# Altium PCB AWSAM_5_Breakout.PcbDoc
Units mm, origin at the board's own origin, x right, y up, seen from the top; angles counter-clockwise.
Board outline 46 x 71.01 mm, 2 copper layers (Top Layer, Bottom Layer); 50 components, 51 nets, 231 pads, 48 vias.
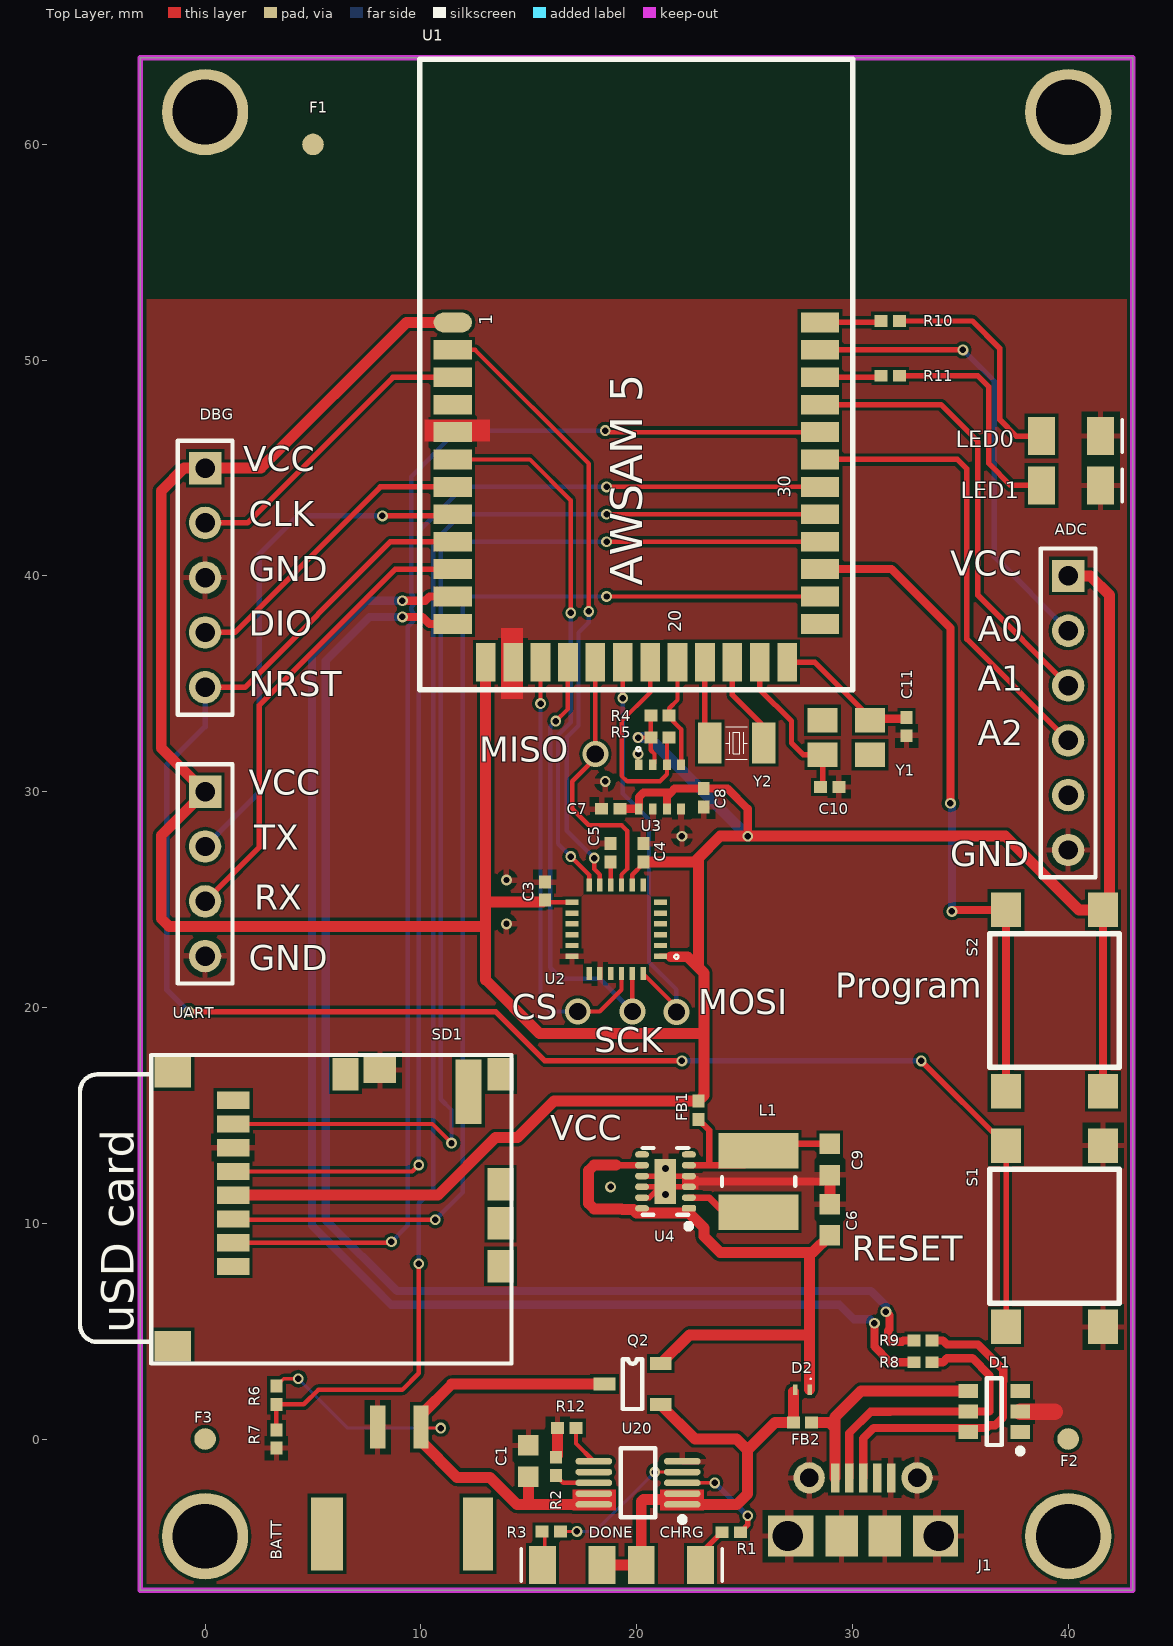
[diagram p0: Top Layer view]
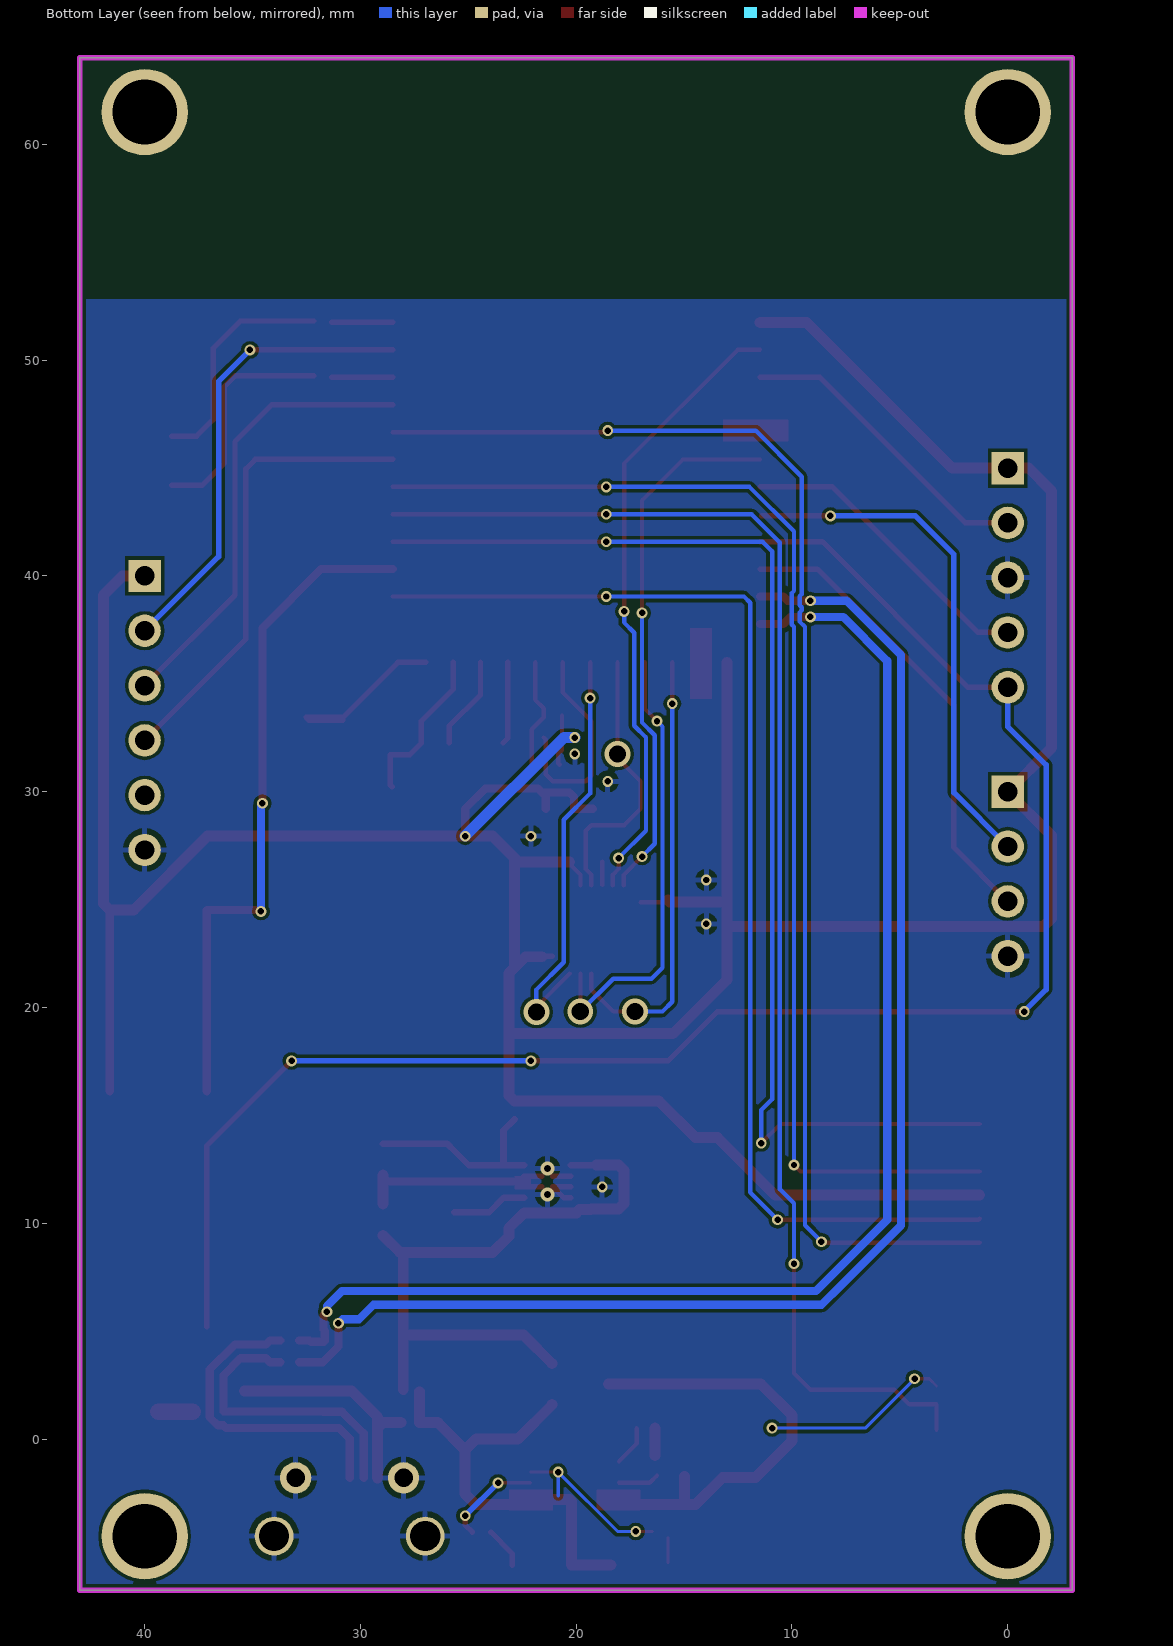
[diagram p1: Bottom Layer view, seen from below]

## Layer stack, top to bottom
Top Solder: solder mask 0.0102, Solder Resist, Dk 3.5
Top Layer: signal copper 0.0356
Dielectric 1: dielectric 0.32, FR-4, Dk 4.8
Bottom Layer: signal copper 0.0356
Bottom Solder: solder mask 0.0102, Solder Resist, Dk 3.5

## Board outline
-3,-7 -3,64.008 43,64.008 43,-7

## Design rules (kind name [scope] priority, off if disabled: settings)
Clearance [All] p1: gap=0.152
DiffPairsRouting [All] p1: maxlimit=0.254 minlimit=0.254 mostfreqgap=0.254 toplayer_minwidth=0.381 toplayer_maxwidth=0.381 toplayer_prefwidth=0.381 bottomlayer_minwidth=0.381 bottomlayer_maxwidth=0.381 bottomlayer_prefwidth=0.381 maxuncoupledlength=12.7
PolygonConnect [All] p1: connectstyle=Relief reliefconductorwidth=0.254 reliefentries=4 polygonreliefangle="90 Angle" airgapwidth=0.254
RoutingVias [All] p1: holewidth=0.3 width=0.5 viastyle="Through Hole" minholewidth=0.3 minwidth=0.5 maxholewidth=0.3 maxwidth=0.5
SilkToSolderMaskClearance [IsPad] p1: minsilkscreentomaskgap=0.152 clearancetoexposedcopper=TRUE
SolderMaskExpansion [All] p1: expansion=0.102
UnpouredPolygon [All] p1: allowunpoured=FALSE
Width [All] p1: maxlimit=0.762 minlimit=0.152 preferedwidth=0.254
27 further rules are at their usual default settings.

## Classes and differential pairs
differential pair USB_D: +USB_D_P -USB_D_N
differential pair USB: +USB_P -USB_N

## Components (designator, comment, footprint, x,y, rotation, side; value= is the part's Value field where it differs from the comment)
ADC "Header 6" HDR1X6 40,40 r270 top
BATT "JST-PH-2" JST-PH-2POS 9,-0.5 r180 top locked
C1 "CAP" CAP0603 14.986,-1.016 r270 top
C3 "CAP" CAP0402 15.748,25.4 r270 top
C4 "CAP" CAP0402 20.32,27.178 r270 top
C5 "CAP" CAP0402 18.796,27.178 r270 top
C6 "CAP" CAP0603 28.956,10.16 r270 top
C7 "CAP" CAP0402 18.796,29.21 r0 top
C8 "CAP" CAP0402 23.114,29.718 r90 top
C9 "CAP" CAP0603 28.956,12.954 r90 top
C10 "CAP" CAP0402 28.956,30.226 r180 top
C11 "CAP" CAP0402 32.512,33.02 r90 top
CHRG "RED" SMT1206-LED 21.59,-5.842 r0 top
D1 "SP0505BAHTG" SOT26A-6L 36.576,1.27 r180 top
D2 "DIODE-SCHOTTKY" DB2G42600L1 27.686,2.286 r270 top
DBG "" HDR1X5 0,45 r270 top locked (schematic designator DBG1)
DONE "RED" SMT1206-LED 17.018,-5.842 r180 top
F1 "FIDUCIAL" FIDUCIAL-1MM#1 -0.5,47 r0 top locked
F2 "FIDUCIAL" FIDUCIAL-1MM#2 35,0 r0 top
F3 "FIDUCIAL" FIDUCIAL-1MM#3 0,0 r0 top
FB1 "IND" IND0402 22.86,15.24 r90 top
FB2 "IND" IND0402 27.686,0.762 r180 top
J1 "1050170001" 1050170001 30.5,-4.5 r0 top locked
L1 "LPS3314" "CoilCraft- LPS3314" 25.654,11.938 r90 top
LED0 "RED" SMT1206-LED 40.132,46.482 r0 top
LED1 "RED" SMT1206-LED 40.132,44.196 r0 top
Q2 "FET-PCH-DIODE" SOT23-3 19.812,2.54 r270 top
R1 "Resistor" SMT0402 24.384,-4.318 r180 top
R2 "RES" SMT0402 16.256,-1.27 r90 top
R3 "Resistor" SMT0402 16.038,-4.282 r180 top
R4 "RES" SMT0402 21.082,33.528 r180 top
R5 "RES" SMT0402 21.082,32.512 r180 top
R6 "RES" SMT0402 3.302,2.032 r90 top
R7 "RES" SMT0402 3.302,0 r90 top
R8 "Resistor" SMT0402 33.274,3.556 r0 top
R9 "Resistor" SMT0402 33.274,4.572 r0 top
R10 "Resistor" SMT0402 31.75,51.816 r180 top
R11 "Resistor" SMT0402 31.75,49.276 r180 top
R12 "RES" SMT0402 16.764,0.508 r180 top
S1 "SW-PB-RESET" "MC32882 Switch" 39.37,9.398 r270 top
S2 "SW-PB-BOOT0" "MC32882 Switch" 39.37,20.32 r270 top
SD1 "Molex 502570" "micro SD" -2.5,3.5 r90 top locked
U1 "AWSAM_5" AWSAM_5 28.5,36 r90 top locked
U2 "MPU-9250" QFN24 19.05,23.622 r180 top
U3 "BME280" BME280 21.082,30.226 r90 top
U4 "TPS62740" TPS62740_12Pin 21.336,11.938 r180 top
U20 "MCP73833-FCI/UN" MSOP-UN10_N 20.066,-2.032 r180 top
UART "Header 4" HDR1X4 0,30 r270 top locked
Y1 "TSX-3225" AP7-00061 29.718,32.512 r90 top
Y2 "CM315-32.768KEZF-UT" "SMD Crystal 32kHz" 24.638,32.258 r0 top

## Footprints (in the part's own frame and the unit in brackets; to place one, negate y for a bottom-side part, rotate by r counter-clockwise, add the part's x,y. Pads: shape width x height; smd on the part's side, far side on the other; paste and mask are expansions set on the pad)
1050170001 [mm] "CONN USB MICRO MOLEX MODIFIED FOR DRILL HITS"
  round 1.8 hole 1.4: 0(-3.5,0) 0(3.5,0)
  rect 2.1x1.9 smd: 0(-3.35,0) 0(3.35,0)
  round 1.45 hole 0.85: 0(-2.5,2.7) 0(2.5,2.7)
  rect 1.5x1.9 smd: 0(-1,0) 0(1,0)
  rect 0.4x1.35 smd: 1(-1.3,2.7) 2(-0.65,2.7) 3(0,2.7) 4(0.65,2.7) 5(1.3,2.7)
  body extent -4.1,-2.5 4.1,2.9, height 2.78
AP7-00061 [mm] "TSX-3225"
  rect 1.15x1.4 smd: 1(-0.8,1.1) 2(-0.8,-1.1) 3(0.8,-1.1) 4(0.8,1.1)
  body extent -1.25,-1.61 1.25,1.61, height 0.82
AWSAM_5 [mil] "Footprint for AWSAM_5"
  oval 36x70 smd: 1(620,670)
  rect 36x70 smd: 2(570,670) 3(520,670) 4(470,670) 5(420,670) 6(370,670) 7(320,670) 8(270,670) 9(220,670) 10(170,670) 11(120,670) 12(70,670) 25(70,0) 26(120,0) 27(170,0) 28(220,0) 29(270,0) 30(320,0) 31(370,0) 32(420,0) 33(470,0) 34(520,0) 35(570,0) 36(620,0)
  rect 70x36 smd: 13(0,610) 14(0,560) 15(0,510) 16(0,460) 17(0,410) 18(0,360) 19(0,310) 20(0,260) 21(0,210) 22(0,160) 23(0,110) 24(0,60)
  silkscreen extent -50,-60 1100,730, body extent 0,0 1100,685, height 170
BME280 [mm] "BOSH SENSORTECH TEMP/PRESS/HUMID SENSOR"
  rect 0.5x0.35 smd: 1(1.025,0.975) 2(1.025,0.325) 3(1.025,-0.325) 4(1.025,-0.975) 5(-1.025,-0.975) 6(-1.025,-0.325) 7(-1.025,0.325) 8(-1.025,0.975)
  silkscreen extent 1.65,0.9 1.85,1.1, body extent -1.25,-1.25 1.25,1.25, height 0.93
CAP0402 [mm] "0402 foorprint SMT"
  rect 0.6x0.55 smd: 1(-0.425,0) 2(0.425,0)
  body extent -0.5,-0.26 0.5,0.26, height 0.57
CAP0603 [mm]
  rect 0.95x0.95 smd: 1(-0.725,0) 2(0.725,0)
  body extent -0.8,-0.41 0.8,0.41, height 0.57
"CoilCraft- LPS3314" [mm]
  rect 1.65x3.7 smd: 1(-1.425,0) 2(1.425,0)
  silkscreen extent -0.2,-1.7 0.2,1.7, body extent -1.7,-1.7 1.7,1.7, height 1.3
DB2G42600L1 [mm]
  rect 0.47x0.21 smd: 1(0,0.33) 2(0,-0.33)
  silkscreen extent -0.51,0.37 -0.49,0.39, body extent -0.33,-0.55 0.33,0.55, height 0.56
FIDUCIAL-1MM#1 [mm] "1MM FIDUCAL MARKER"
  round 1 smd mask+0.5: 1(5.5,13)
FIDUCIAL-1MM#2 [mm] "1MM FIDUCAL MARKER"
  round 1 smd mask+0.5: 1(5,0)
FIDUCIAL-1MM#3 [mm] "1MM FIDUCAL MARKER"
  round 1 smd mask+0.5: 1(0,0)
HDR1X4 [mm] "Connector; Header; 4 Position"
  rect 1.5x1.5 hole 0.9: 1(0,0)
  round 1.5 hole 0.9: 2(2.54,0) 3(5.08,0) 4(7.62,0)
  silkscreen extent -1.27,-1.27 8.89,1.27
HDR1X5 [mm] "Connector; Header; 5 Position"
  rect 1.5x1.5 hole 0.9: 1(0,0)
  round 1.5 hole 0.9: 2(2.54,0) 3(5.08,0) 4(7.62,0) 5(10.16,0)
  silkscreen extent -1.27,-1.27 11.43,1.27
HDR1X6 [mm] "Connector; Header; 6 Position"
  rect 1.5x1.5 hole 0.9: 1(0,0)
  round 1.5 hole 0.9: 2(2.54,0) 3(5.08,0) 4(7.62,0) 5(10.16,0) 6(12.7,0)
  silkscreen extent -1.27,-1.27 13.97,1.27
IND0402 [mm] "0402 foorprint SMT"
  rect 0.6x0.55 smd: 1(-0.425,0) 2(0.425,0)
  body extent -0.5,-0.25 0.5,0.25, height 0.5
JST-PH-2POS [mm] "JST-PH 2POS SM R/A 2.0mm"
  rect 1.4x3.4 smd: 0(-3.65,3.9)
  rect 1.5x3.4 smd: 0(3.35,3.9)
  rect 0.7x2 smd: 1(1,-1.05) 2(-1,-1.05)
"MC32882 Switch" [mm] "MULTICOMP  MC32882  SWITCH, TACTILE, 50MA, 12VDC, SMD"
  rect 1.6x1.4 smd: 1(-4.2,-2.25) 1(4.2,-2.25) 2(-4.2,2.25) 2(4.2,2.25)
  silkscreen extent -3.1,-3 3.1,3
"micro SD" [mm]
  rect 0.8x1.5 smd: 1(4.5,-3.8) 2(5.6,-3.8) 3(6.7,-3.8) 4(7.8,-3.8) 5(8.9,-3.8) 6(10,-3.8) 7(11.1,-3.8) 8(12.2,-3.8)
  rect 1.2x1.5 smd: 9(13.6,-10.6)
  rect 1.5x1.2 smd: 10(6.5,-16.2) 13(4.5,-16.2) 14(13.4,-16.2) 15(8.3,-16.2) 17(13.4,-9)
  rect 1.4x1.7 smd: 11(0.8,-1) 12(13.5,-1)
  rect 3x1.2 smd: 16(12.6,-14.7)
  silkscreen extent 0,-16.7 14.3,3.3
MSOP-UN10_N [mm] "TSSOP, 10-Leads, Body 3x3mm, Pitch 0.5mm, IPC Medium Density"
  oval 1.7x0.3 smd: 1(-2.05,1) 2(-2.05,0.5) 3(-2.05,0) 4(-2.05,-0.5) 5(-2.05,-1) 6(2.05,-1) 7(2.05,-0.5) 8(2.05,0) 9(2.05,0.5) 10(2.05,1)
  silkscreen extent -2.17,-1.6 0.8,1.82, body extent -1.6,-1.6 1.6,1.6, height 1.1
QFN24 [mm]
  rect 0.6x0.25 smd mask+0.1: 1(-2.05,1.25) 2(-2.05,0.75) 3(-2.05,0.25)
  rect 0.6x0.25 smd mask+0.102: 4(-2.05,-0.25) 5(-2.05,-0.75) 6(-2.05,-1.25) 13(2.05,-1.25) 14(2.05,-0.75) 15(2.05,-0.25) 16(2.05,0.25) 17(2.05,0.75) 18(2.05,1.25)
  rect 0.25x0.6 smd mask+0.102: 7(-1.25,-2.05) 8(-0.75,-2.05) 9(-0.25,-2.05) 10(0.25,-2.05) 11(0.75,-2.05) 12(1.25,-2.05) 19(1.25,2.05) 20(0.75,2.05) 21(0.25,2.05) 22(-0.25,2.05) 23(-0.75,2.05) 24(-1.25,2.05)
  silkscreen extent -2.89,1.17 -2.69,1.37, body extent -2.05,-2.05 2.05,2.05, height 0.95
"SMD Crystal 32kHz" [mm]
  rect 1.1x1.9 smd mask+0.1: 1(-1.25,0) 2(1.25,0)
  silkscreen extent -0.5,-0.75 0.5,0.75, body extent -1.6,-0.75 1.6,0.75, height 0.9
SMT0402 [mm] "0402 foorprint SMT"
  rect 0.6x0.55 smd: 1(-0.425,0) 2(0.425,0)
  body extent -0.59,-0.25 0.59,0.25, height 2.65
SMT1206-LED [mm]
  rect 1.25x1.75 smd: 1(-1.375,0) 2(1.375,0)
  silkscreen extent 2.37,-0.75 2.37,0.75, body extent -1.6,-0.8 1.6,0.8, height 1.78
SOT23-3 [mm] "SOT23-3"
  round 0.2 on Top Overlay: 1(-1.5,-0.55)
  rect 0.6x1 smd: 1(0.95,1.3) 2(-0.95,1.3) 3(0,-1.3)
  silkscreen extent -1.15,-0.45 1.15,0.45, body extent -1.45,-1.4 1.45,1.4, height 1.3
SOT26A-6L [mm] "SOT23, 6-Leads, Body 2.9x1.7mm, Pitch 0.95mm, Lead Span 2.8mm, IPC High Density"
  rect 0.9x0.65 smd: 1(-1.2,0.95) 2(-1.2,0) 3(-1.2,-0.95) 4(1.2,-0.95) 5(1.2,0) 6(1.2,0.95)
  silkscreen extent -1.33,-1.55 0.35,1.95, body extent -0.9,-1.55 0.9,1.55, height 1.45
TPS62740_12Pin [mm]
  rrect50% 0.65x0.3 smd: 1(-1.085,1.25)
  oval 0.65x0.3 smd: 2(-1.085,0.75) 3(-1.085,0.25) 4(-1.085,-0.25) 5(-1.085,-0.75) 6(-1.085,-1.25) 7(1.085,-1.25) 8(1.085,-0.75) 9(1.085,-0.25) 10(1.085,0.25) 11(1.085,0.75) 12(1.085,1.25)
  rect 1x2.1 smd: 13(0,0)
  silkscreen extent -1.2,-1.55 1.05,2.2, body extent -1.05,-1.55 1.05,1.55, height 0.8

## Part data
ADC: "Header, 6-Pin"
BATT: library part S2B-PH-SM4-TB, "CONN SM JST PH 2-POS"
C1 C6 C9: library part CAP-SM-0603-X5R-10uF, "CAP SM 0603 X5R 10uF"
C3 C5 C7 C8: library part CAP-SM-0402-X7R-100NF, "CAP SM 0402 X7R 100NF"
C4: library part CAP-SM-0402-X7R-10NF, "CAP SM 0402 X7R 10NF"
C10 C11: library part CAP-SM-0402-NP0-10PF, "CAP SM 0402 NP0 10PF"
CHRG DONE LED0 LED1: library part LTST-C150KRKT, "LED SM 1206 RED 2V FWD VOLTAGE"
D1: "IC DIODE TRANS VOLT SUPPR 5 PACKAGE"
D2: library part PMEG3020BER, "DIODE  SCHOTTKY 1A 40V"
DBG: library part "Header 5", "Header, 5-Pin"
F1 F2 F3: library part FIDUCIAL-1MM, "FIDUCIAL 1MM CENTER"
FB1 FB2: library part BLM15AX102SN1D, "FERRITE BEAD 350mA 0402"
J1: "CONN RCPT MICRO USB R/A SMD"
L1: library part Inductor, "Inductor"
Q2: library part FDN338P, "MOSFET P-CH 20V 115MA SOT23-3"
R1 R3 R10 R11: library part RES-SM-0603-220R, "RES SM 0603 220R"
R2 R4 R5: library part RES-SM-0402-10K, "RES SM 0402 10K"
R6 R7: library part RES-SM-0402-100K, "RES SM 0402 100K"
R8 R9: library part RES-SM-0603-22K, "RES SM 0603 22K"
R12: library part RES-SM-0402-1K, "RES SM 0402 1K"
S1 S2: library part SW-PB, "Switch"
SD1: library part MOLEX-502570, "CONN SM MICROSD"
U2: "IC 9DOF IMU"
U3: "IC SENSOR PRESS/HUMID/TEMP"
U4: "IC REG BUCK"
U20: "Stand-Alone Linear Li-Ion/Li-Polymer Charge Management Controller with Power-Good Output, 4.2V, 10-Pin MSOP, Industrial Temperature"
UART: "Header, 4-Pin"
Y1: library part A07-0078, "16MHz uXtal, 3.2 x 2.5 mm SMD, CL=9pF, 15PPM, ESR=80ohm(Max."
Y2: "CRYSTAL 32.768KHZ 12.5PF SMD"

## Free pads (board coordinates)
  round 4 hole 3: 0(0,-4.5) 0(0,61.5) 0(40,-4.5) 0(40,61.5)

## Via types
v1: diameter 0.5, hole 0.3, Top Layer to Bottom Layer, 35 vias
v2: diameter 0.5, hole 0.3, Top Layer to Bottom Layer, tented top, 7 vias
v3: diameter 1.2, hole 0.8, Top Layer to Bottom Layer, 4 vias
v4: diameter 0.66, hole 0.33, Top Layer to Bottom Layer, 2 vias

## Nets (pads, with @x,y where several pads share a name; then routed paths per layer and width w, separated by ;. In a path a pad name is that pad's centre, name@x,y a point inside that pad or via, vN(x,y) a via of type N, cw(c..) or ccw(c..) an arc to the next point about the centre after c; other vN are vias at no path point)
ADC0: ADC.2 U1.35 | length 21.6
  Top Layer w0.254: U1.35 v1(35.12,50.478)
  Bottom Layer w0.254: v1(35.12,50.478) 36.576,49.022 36.576,40.894 ADC.2@40,37.47
ADC1: ADC.3 U1.33 | length 21.1
  Top Layer w0.254: U1.33 34.104,47.938 35.814,46.228 35.814,39.106 ADC.3
ADC2: ADC.4 U1.31 | length 21.5
  Top Layer w0.254: U1.31 34.866,45.398 35.306,44.958 35.306,37.074 ADC.4
ADC3: R6.1 R7.2 U1.29 | length 65.6
  Top Layer w0.203: R7.2 R6.1 4.572,1.607 5.251,2.286 9.144,2.286 9.906,3.048 v1(9.906,8.128) ; v2(18.61,42.858) U1.29
  Bottom Layer w0.203: v1(9.906,8.128) 9.906,10.922 10.566,11.582 10.566,41.554 11.87,42.858 v2(18.61,42.858)
BOOT0: S2.1 U1.27 | length 31.3
  Top Layer w0.381: U1.27 31.818,40.318 34.544,37.592 v1(34.544,29.464) ; v1(34.612,24.452) 34.68,24.52 37.12,24.52 S2.1@37.12,16.12
  Bottom Layer w0.381: v1(34.544,29.464) 34.612,29.396 v1(34.612,24.452)
CHRG: U1.4
GND: ADC.6 BATT.1 C1.1 C3.1 C4.1 C5.1 C6.1 C7.1 C8.1 C9.1 C10.1 C11.1 D1.2 DBG.3 J1.0 J1.5 LED0.2 LED1.2 R2.2 R7.1 R12.2 S1.2 SD1.6 SD1.9 U1.5 U1.14 U2.18 U2.20 U3.1 U3.5 U3.7 U4.3 U4.4 U4.9 U4.10 U4.11 U4.13 U20.5 UART.4 | length 15.1
  Top Layer w0.254: R2.2 R2.2@16.339,-0.762 ; U4.11 20.586,11.188 21.086,11.688 U4.10 ; U4.9 U4.13@21.086,12.188 ; U4.13@21.586,11.688 U4.3 ; U4.13@21.586,12.188 U4.4 ; C9.1@28.665,11.938 C9.1
  Top Layer w0.381: 22.671,11.938 C9.1@28.665,11.938
  Top Layer w0.508: R2.2@16.339,-0.762 R12.2 ; C6.1 C9.1
  Top Layer w0.762: D1.2 39.37,1.27
  other v1: 18.796,11.684 13.97,23.876 13.97,25.908 22.098,27.94 18.542,30.48 20.066,31.75
  other v4: 21.336,11.338 21.336,12.538
I2C_SCL: R5.1 U1.19 U3.3 | length 9.9
  Top Layer w0.203: U1.19 20.626,34.596 19.304,33.274 19.304,30.734 19.558,30.48 21.082,30.48 21.407,30.805 U3.3 21.407,32.412 R5.1
I2C_SDA: R4.1 U1.20 U3.4 | length 5.1
  Top Layer w0.203: U1.20 21.896,34.254 21.507,33.865 R4.1 21.507,33.446 22.061,32.892 22.061,31.251 U3.4
LED0: R10.2 U1.36 | length 2.8
  Top Layer w0.254: U1.36 R10.2@31.325,51.748
LED1: R11.2 U1.34 | length 2.8
  Top Layer w0.254: U1.34 R11.2@31.325,49.208
MPU_INT: U1.6 U2.12 | length 24.9
  Top Layer w0.203: U1.6 15.054,45.398 16.95,43.502 v2(16.95,38.286) ; v1(16.95,26.992) 17.8,26.142 U2.12
  Bottom Layer w0.203: v1(16.95,26.992) 16.358,27.584 16.358,32.614 16.95,33.206 v2(16.95,38.286)
MPU_SYNC: U1.2 U2.11 | length 29.1
  Top Layer w0.203: U1.2 12.514,50.478 17.784,45.208 17.78,45.204 v2(17.78,38.354) ; v1(18.034,26.924) 18.034,26.416 18.3,26.15 U2.11
  Bottom Layer w0.203: v2(17.78,38.354) 17.78,37.846 17.306,37.372 17.306,33.059 16.764,32.517 16.764,28.194 v1(18.034,26.924)
NetC5_2: C5.2 U2.10 | length 1.1
  Top Layer w0.203: U2.10@18.796,25.676 C5.2
NetC9_2: C9.2 FB1.1 L1.2 U4.5 | length 9.3
  Top Layer w0.305: U4.5 23.368,12.688 ; FB1.1 23.368,14.307 23.368,12.688 ; C9.2 25.97,13.679 L1.2 24.979,12.688 23.368,12.688
NetC10_2: C10.2 U1.23 Y1.1 | length 7.5
  Top Layer w0.254: U1.23 25.706,34.746 27.178,33.274 27.178,32.258 27.724,31.712 Y1.1 28.618,30.313 C10.2
NetC11_2: C11.2 U1.24 Y1.3 | length 8.3
  Top Layer w0.254: U1.24 28.262,36 30.817,33.445 C11.2 32.379,33.312 Y1.3
NetCHRG_2: CHRG.2 R1.2 | length 1.9
  Top Layer w0.254: CHRG.2 22.965,-5.312 R1.2
NetD1_4: D1.4 FB2.1 J1.1 | length 10.7
  Top Layer w0.508: FB2.1 28.946,0.762 29.2,0.508 ; J1.1 29.2,0.508 ; D1.4 30.404,2.22 29.2,1.016 29.2,0.508
NetDONE_2: DONE.2 R3.2 | length 1.2
  Top Layer w0.152: DONE.2@15.748,-5.737 15.748,-4.572
NetL1_1: L1.1 U4.2 | length 3.5
  Top Layer w0.305: U4.2 23.356,11.188 24.031,10.513 L1.1
NetLED0_1: LED0.1 R10.1 | length 10.7
  Top Layer w0.254: R10.1 35.56,51.816 36.83,50.546 36.83,47.244 37.592,46.482 LED0.1
NetLED1_1: LED1.1 R11.1 | length 10.8
  Top Layer w0.254: R11.1 35.814,49.276 36.322,48.768 36.322,45.212 37.338,44.196 LED1.1
NetR1_1: R1.1 U20.3 | length 4.6
  Top Layer w0.152: U20.3 v1(23.622,-2.032)
  Top Layer w0.254: R1.1 25.146,-3.981 v1(25.146,-3.556)
  Bottom Layer w0.254: v1(23.622,-2.032) v1(25.146,-3.556)
NetR2_1: R2.1 U20.8 | length 1.9
  Top Layer w0.203: R2.1 16.593,-2.032 U20.8
NetR3_1: R3.1 U20.4 | length 7.9
  Top Layer w0.152: R3.1 v1(17.236,-4.282) ; v1(20.836,-1.532) U20.4
  Bottom Layer w0.152: v1(17.236,-4.282) 18.086,-4.282 v1(20.836,-1.532) 20.836,-2.631
NetR12_1: R12.1 U20.6 | length 1.9
  Top Layer w0.203: R12.1 17.189,-0.205 U20.6
NetU1_21: U1.21 Y2.1 | length 3.8
  Top Layer w0.254: U1.21 23.166,32.48 Y2.1
NetU1_22: U1.22 Y2.2 | length 4.3
  Top Layer w0.254: U1.22 24.436,34.492 25.888,33.04 Y2.2
NRST: DBG.5 S1.1 U1.9 | length 79.3
  Top Layer w0.254: v1(-0.762,19.812) 13.462,19.812 15.748,17.526 v1(22.098,17.526) ; DBG.5 1.84,34.84 8.588,41.588 U1.9 ; v1(33.192,17.526) 37.12,13.598 S1.1@37.12,5.198
  Bottom Layer w0.254: v1(-0.762,19.812) -1.778,20.828 -1.778,31.242 0,33.02 DBG.5 ; v1(22.098,17.526) v1(33.192,17.526)
RX: U1.10 UART.3 | length 21.7
  Top Layer w0.254: UART.3 2.5,27.42 2.5,34 8.818,40.318 U1.10
SPI0_CS: U1.15 U2.22 | length 20.8
  Top Layer w0.203: v1(15.546,34.088) U1.15 ; v3(17.272,19.812) 18.288,19.812 19.3,20.824 U2.22
  Bottom Layer w0.203: v1(15.546,34.088) 15.546,20.268 16.002,19.812 v3(17.272,19.812)
SPI0_MISO: U1.17 U2.9 | length 12.8
  Top Layer w0.203: U1.17 18.086,31.548 17.018,30.48 17.018,29.21 17.78,28.448 19.304,28.448 19.558,28.194 19.558,26.416 19.3,26.158 U2.9
  other v3: 18.086,31.75
SPI0_MOSI: U1.18 U2.24 | length 19.7
  Top Layer w0.203: v1(19.356,34.342) U1.18 ; U2.24 21.844,20.028 v3(21.844,19.793)
  Bottom Layer w0.203: v1(19.356,34.342) 19.356,29.92 20.574,28.702 20.574,22.098 21.844,20.828 v3(21.844,19.793)
SPI0_SCK: U1.16 U2.23 | length 20.9
  Top Layer w0.203: v1(16.256,33.274) 16.816,33.834 U1.16 ; v3@19.8,19.824 U2.23
  Bottom Layer w0.203: v1(16.256,33.274) 16.002,33.02 16.002,21.844 16.51,21.336 18.288,21.336 v3@19.8,19.824
  other v3: 19.812,19.812
SPI2_CS: SD1.2 U1.32 | length 63.2
  Top Layer w0.203: SD1.2 8.592,9.1 v1(8.636,9.144) ; v2(18.542,46.736) 18.61,46.668 U1.32
  Bottom Layer w0.203: v1(8.636,9.144) 9.398,9.906 9.398,37.641 9.648,37.891 9.648,38.309 9.55,38.406 9.55,38.548 9.648,38.645 9.648,39.063 9.55,39.16 9.55,44.602 11.684,46.736 v2(18.542,46.736)
SPI2_MISO: SD1.7 U1.28 | length 55.9
  Top Layer w0.203: SD1.7 10.536,14.6 v1(11.42,13.716) ; v2(18.61,41.588) U1.28
  Bottom Layer w0.203: v1(11.42,13.716) 11.42,15.25 10.922,15.748 10.922,41.148 11.362,41.588 v2(18.61,41.588)
SPI2_MOSI: SD1.3 U1.26 | length 55.2
  Top Layer w0.203: SD1.3 1.34,10.16 v1(10.668,10.16) ; v2(18.61,39.048) U1.26
  Bottom Layer w0.203: v1(10.668,10.16) 11.938,11.43 11.938,38.76 12.226,39.048 v2(18.61,39.048)
SPI2_SCK: SD1.5 U1.30 | length 57.6
  Top Layer w0.203: SD1.5 9.606,12.4 v1(9.906,12.7) ; v2(18.61,44.128) U1.30
  Bottom Layer w0.203: v1(9.906,12.7) 9.906,37.646 10.004,37.744 10.004,39.21 9.906,39.308 9.906,42.066 11.968,44.128 v2(18.61,44.128)
SW1: SD1.10
SWCLK: DBG.2 U1.3 | length 14.3
  Top Layer w0.254: DBG.2 1.96,42.46 8.708,49.208 U1.3
SWDIO: DBG.4 U1.7 | length 14.3
  Top Layer w0.254: DBG.4 1.38,37.38 8.128,44.128 U1.7
TX: U1.8 UART.2 | length 24.2
  Top Layer w0.254: v1(8.218,42.782) U1.8@11.406,42.782
  Bottom Layer w0.254: UART.2 2.5,29.96 2.5,41 4.282,42.782 v1(8.218,42.782)
USB_D_N: R8.1 U1.11 | length 65.2
  Top Layer w0.381: v1(9.144,38.854) 10.209,38.854 10.402,39.048 U1.11 ; v1(31.02,5.366) 31.02,4.286 31.75,3.556 R8.1
  Bottom Layer w0.381: v1(9.144,38.854) 7.476,38.854 5.139,36.517 4.953,36.331 4.953,9.897 5.139,9.711 7.738,7.112 8.627,6.223 29.396,6.223 30.068,5.551 30.836,5.551 v1(31.02,5.366)
USB_D_P: R9.1 U1.12 | length 63.3
  Top Layer w0.381: v1(9.144,38.1) 10.08,38.1 10.402,37.778 U1.12 ; v1(31.554,5.9) 31.715,5.738 31.715,5.079 31.655,5.019 31.655,4.549 31.691,4.513 32.3,4.513 32.359,4.572 R9.1
  Bottom Layer w0.381: v1(9.144,38.1) 7.62,38.1 5.588,36.068 5.588,10.16 8.89,6.858 30.862,6.858 31.552,6.168 v1(31.554,5.9) v1(31.554,5.9)
USB_N: D1.5 J1.2 R8.2 | length 13.7
  Top Layer w0.381: J1.2 29.85,0.268 30.844,1.262 31.75,1.262 ; 31.75,1.27 D1.5 36.348,1.27 36.348,2.95 36.352,2.954 35.56,3.746 34.38,3.746 34.189,3.556 R8.2
USB_P: D1.6 J1.3 R9.2 | length 14.8
  Top Layer w0.381: J1.3 30.5,0.02 30.988,0.508 36.221,0.508 36.348,0.635 36.611,0.635 36.983,1.007 36.983,2.687 36.987,2.691 36.987,3.217 35.823,4.381 34.38,4.381 34.189,4.572 R9.2
VBATT: BATT.2 C1.2 Q2.3 R6.2 U20.9 U20.10 | length 30.4
  Top Layer w0.152: R6.2 3.639,2.794 v1(4.318,2.794) ; BATT.2@10.042,0.508 v1(10.922,0.508)
  Top Layer w0.508: C1.2 14.986,-3.032 ; U20.10 14.986,-3.032 ; Q2.3 11.43,2.54 10,1.11 BATT.2 10,-0.094 11.684,-1.778 13.208,-1.778 14.462,-3.032 14.986,-3.032
  Bottom Layer w0.152: v1(4.318,2.794) 6.604,0.508 v1(10.922,0.508)
VCC: ADC.1 C3.2 C4.2 C7.2 C8.2 DBG.1 FB1.2 R4.2 R5.2 S2.2 SD1.4 U1.1 U1.13 U2.1 U2.8 U2.13 U3.2 U3.6 U3.8 UART.1 | length 189
  Top Layer w0.203: C3.2 15.851,24.872 U2.13 ; U2.8 19.8,26.15 20.32,26.67 C4.2 ; v1(20.066,32.512) R5.2 ; R4.2 R5.2 ; U3.2 20.828,31.322 20.828,31.75 20.657,31.921 R5.2
  Top Layer w0.254: U2.1 21.57,22.372 21.59,22.352
  Top Layer w0.381: C7.2 20.098,29.21 U3.8 20.107,29.759 20.314,29.966 21.584,29.966 ; U3.6 21.407,29.789 21.584,29.966 ; v1(25.146,27.94) 25.146,29.21 24.213,30.143 C8.2 21.761,30.143 21.584,29.966 ; S2.2@41.62,16.12 S2.2@41.62,24.52
  Top Layer w0.508: SD1.4 10.792,11.3 13.462,13.97 14.478,13.97 16.173,15.665 FB1.2 23.114,15.919 23.114,21.59 22.352,22.352 21.59,22.352 ; U1.1 9.33,51.748 2.582,45 DBG.1 -0.974,45 -2.032,43.942 -2.032,32.032 UART.1 -2.032,27.968 -2.032,24.13 -1.666,23.764 12.864,23.764 13.006,23.622 ; U1.13 13.006,24.892 ; C3.2 15.665,24.892 13.006,24.892 ; C4.2 22.689,26.753 22.86,26.924 ; 22.86,18.796 22.851,18.787 15.503,18.787 13.006,21.284 13.006,23.622 ; 22.86,21.844 22.86,26.924 ; ADC.1 41.026,40 41.91,39.116 41.91,24.81 41.62,24.52 40.504,24.52 37.084,27.94 v1(25.146,27.94) 23.876,27.94 22.86,26.924 ; 13.006,23.622 13.006,24.892
  Bottom Layer w0.508: v1(20.066,32.512) 20.574,32.512 v1(25.146,27.94)
VIN: C6.2 D2.1 Q2.2 U4.1 U4.8 U4.12 | length 30.5
  Top Layer w0.305: 19.05,12.7 19.062,12.688 U4.8
  Top Layer w0.508: 19.05,12.7 18.034,12.7 17.78,12.446 17.78,10.922 18.034,10.668 19.304,10.668 19.34,10.632 19.848,10.632 19.997,10.483 20.666,10.483 20.666,10.482 22.004,10.482 22.006,10.483 22.421,10.483 23.114,9.79 23.114,9.398 23.876,8.636 28.157,8.636 C6.2 ; Q2.2 22.448,4.826 28.016,4.826 ; D2.1 28.016,4.826 ; 28.016,8.495 28.016,4.826
VUSB: CHRG.1 D2.2 DONE.1 FB2.2 Q2.1@21.112,1.59 U20.1 U20.2 | length 20.7
  Top Layer w0.508: DONE.1 CHRG.1 20.215,-2.899 20.32,-2.794 21.844,-2.794 ; Q2.1@21.112,1.59 22.702,0 24.638,0 25.146,-0.508 ; U20.1 24.654,-3.032 25.146,-2.54 25.146,-0.508 ; D2.2@27.261,2.191 FB2.2 26.416,0.762 25.146,-0.508
pads on no net: ADC.5 BATT.0 D1.1 D1.3 F1.1 F2.1 F3.1 J1.4 Q2.1@19.262,4.04 SD1.1 SD1.8 SD1.11 SD1.12 SD1.13 SD1.14 SD1.15 SD1.16 SD1.17 U1.25 U2.2 U2.3 U2.4 U2.5 U2.6 U2.7 U2.14 U2.15 U2.16 U2.17 U2.19 U2.21 U4.6 U4.7 U20.7 Y1.2 Y1.4

## Polygon pours and split planes (outlines as drawn)
GND on Top Layer "Top Layer-No Net" (solid, pour order 2): -3,52.832 43,52.832 43,-7 -3,-7 -3,52.832
GND on Bottom Layer "Bot-Gnd" (solid, pour order 2): -3,52.832 43,52.832 43,-7 -3,-7 -3,52.832

## Keep-outs
Keep-Out Layer:
  the board outline again, w0.254

## Other copper
Top Layer:
  rectangle net GND: 10.16,46.228 13.208,47.244
  rectangle net GND: 13.716,34.29 14.732,37.592
  region net GND: 22.86,12.192 22.098,12.192 22.098,11.557 22.86,11.557
  rectangle net VUSB: 21.082,-3.302 23.114,-2.337
  rectangle net VBATT: 17.018,-3.302 19.05,-2.337

## Silkscreen, mask and mechanical layers (free items; w line width, h text height)
Top Overlay:
  text "VCC" at 1.778,44.45 h2
  text "CLK" at 2.032,41.91 h2
  text "VCC" at 34.544,39.624 h2
  text "GND" at 2.032,39.37 h2
  text "DIO" at 2.032,36.83 h2
  text "A0" at 35.814,36.576 h2
  text "A1" at 35.814,34.29 h2
  text "NRST" at 2.032,34.036 h2
  text "A2" at 35.814,31.75 h2
  text "MISO" at 12.7,30.988 h2
  text "VCC" at 2.032,29.464 h2
  text "TX" at 2.286,26.924 h2
  text "GND" at 34.544,26.162 h2
  text "RX" at 2.286,24.13 h2
  text "GND" at 2.032,21.336 h2
  text "Program" at 29.21,20.066 h2
  text "MOSI" at 22.86,19.304 h2
  text "CS" at 14.224,19.05 h2
  text "SCK" at 18.034,17.526 h2
  text "VCC" at 16.002,13.462 h2
  text "RESET" at 29.972,7.874 h2

## Text inside footprints (layer, text, board x,y; h text height)
SD1: Top Overlay "uSD card" at -3.3,4.9 h1.5 r90
U1: Top Overlay "30" at 27.357,43.62 h1.02 r90; Top Overlay "20" at 22.277,37.397 h1.02 r90; Top Overlay "1" at 13.514,51.621 h1.02 r90; Top Overlay "AWSAM 5" at 20.753,39.556 h2.54 r90; Mechanical 1 "NO Copper Zone" at 28.373,58.86 h2.54 r180